# Altium PCB Expansor_conn.PcbDoc
Units mm, origin at the board's own origin, x right, y up, seen from the top; angles counter-clockwise.
Board outline 149.86 x 116.48 mm, 2 copper layers (Top Layer, Bottom Layer); 7 components, 31 nets, 70 pads, 5 vias.
Unrouted connection lines stored in the file: 5.
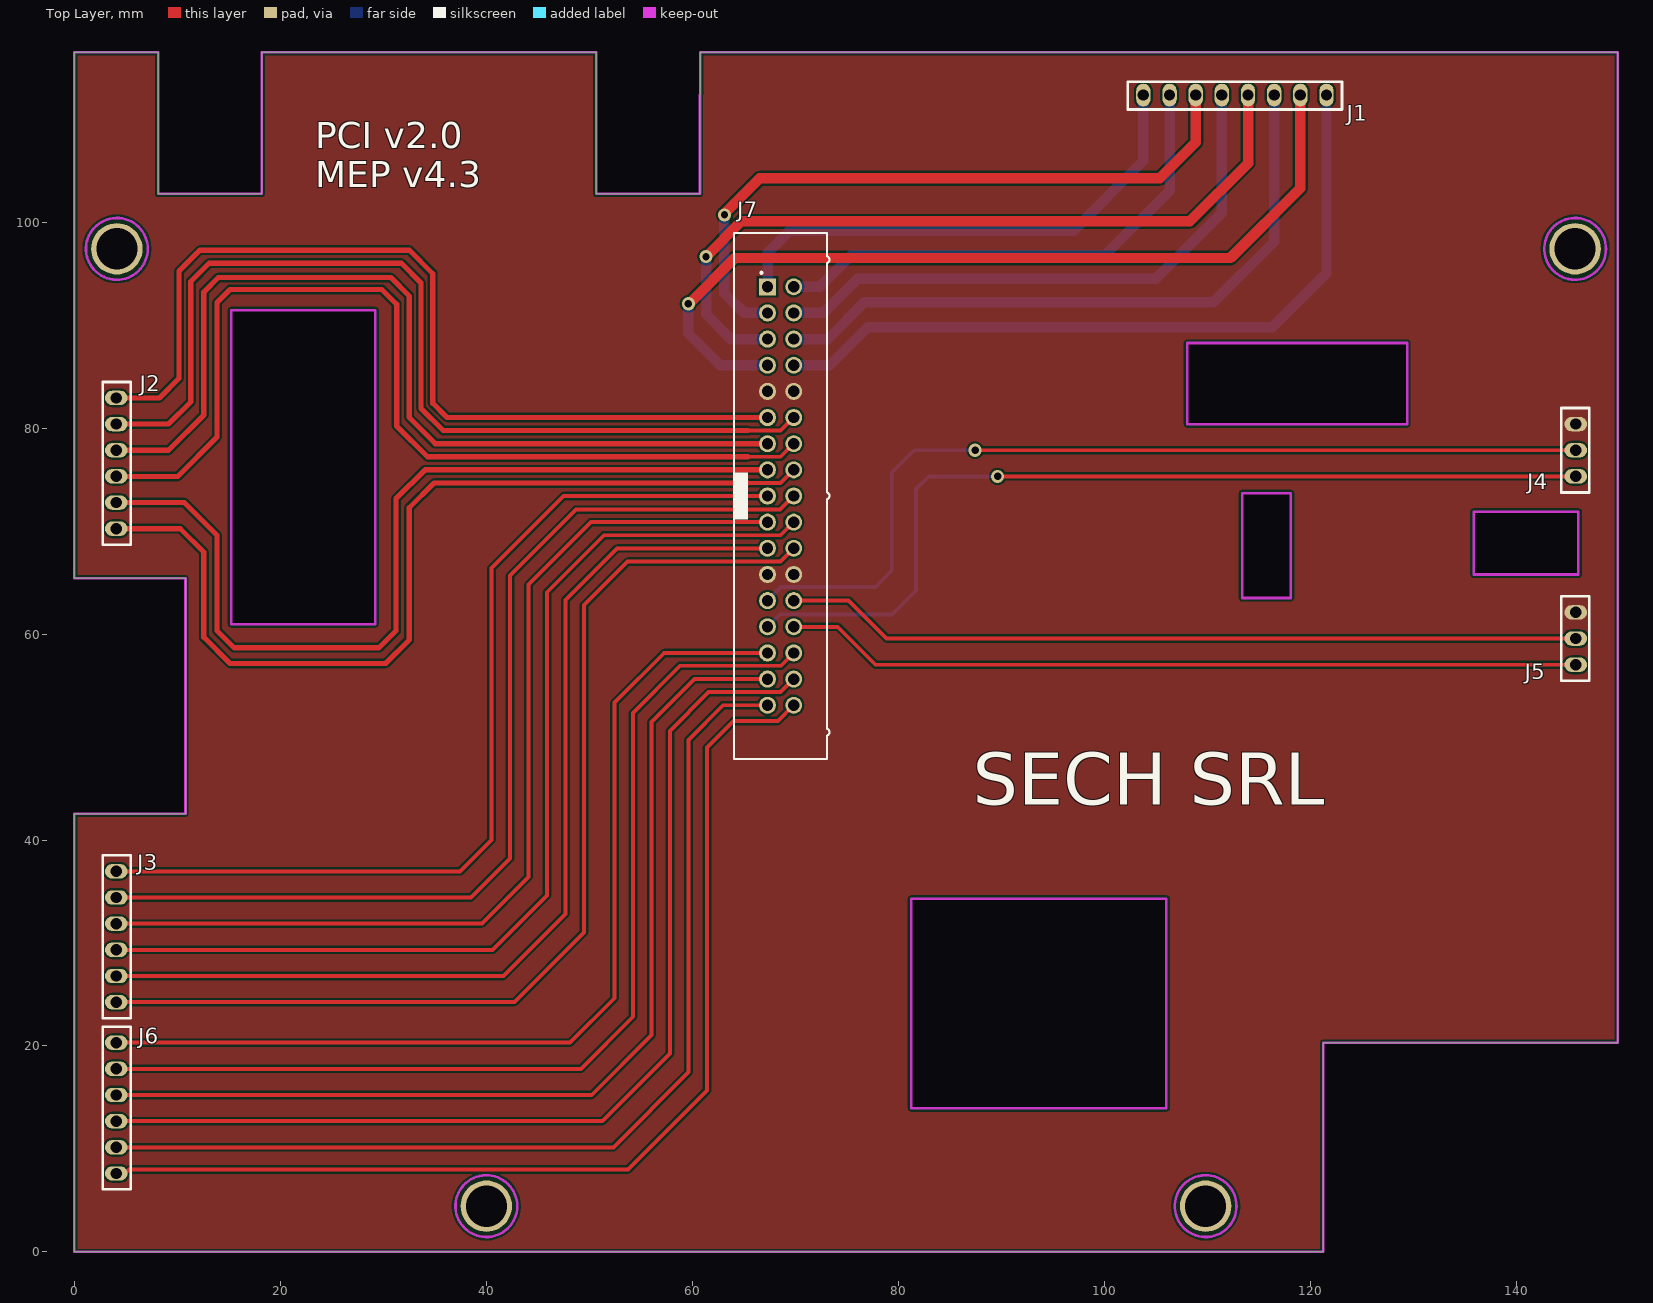
[diagram p0: Top Layer view]
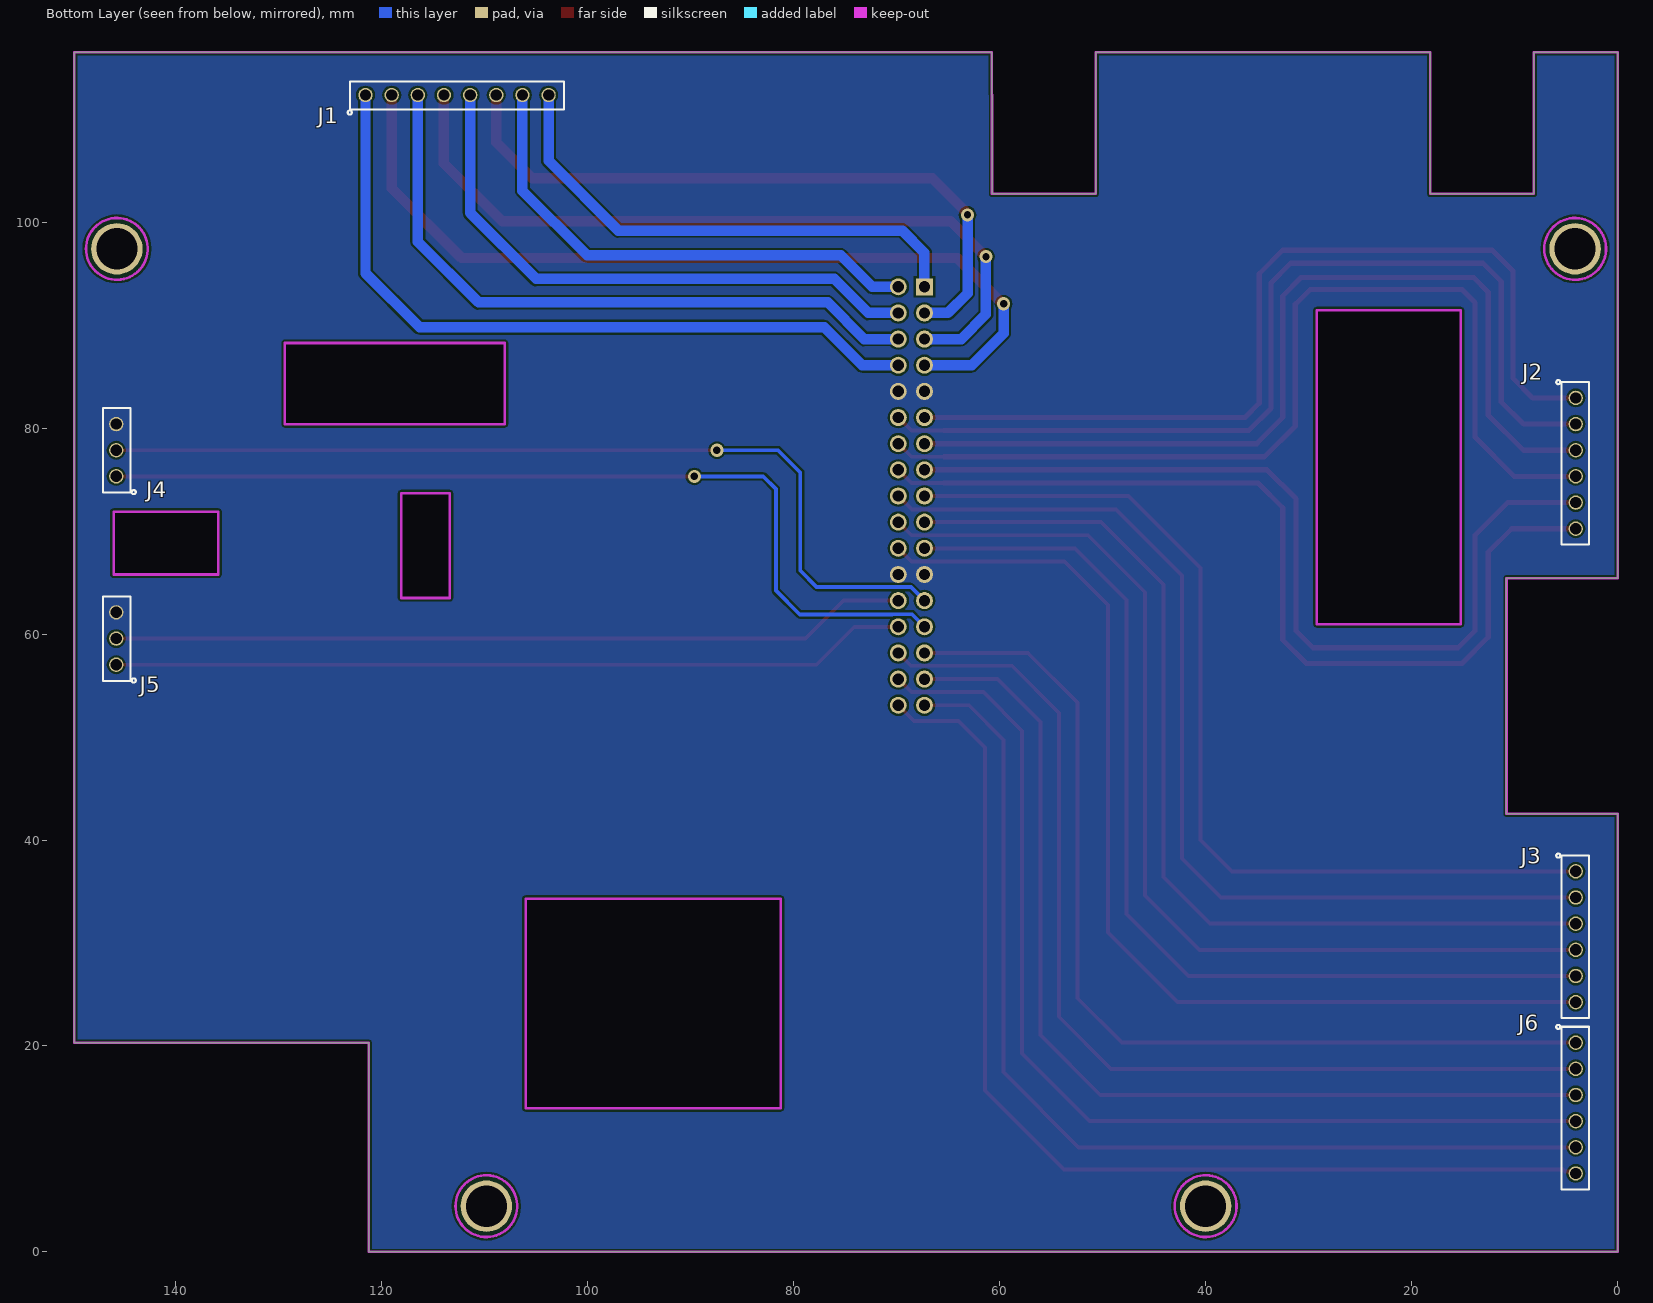
[diagram p1: Bottom Layer view, seen from below]

## Layer stack, top to bottom
Top Solder: solder mask 0.0102, Solder Resist, Dk 3.5
Top Layer: signal copper 0.0356
Dielectric 1: dielectric 0.32, FR-4, Dk 4.8
Bottom Layer: signal copper 0.0356
Bottom Solder: solder mask 0.0102, Solder Resist, Dk 3.5

## Board outline
0,0 0,42.545 10.795,42.545 10.795,65.405 0,65.405 0,116.484 8.128,116.484 8.128,102.742 18.193,102.742 18.193,112.394 18.195,112.394 18.195,116.484 50.684,116.484 50.684,102.742 60.749,102.742 60.749,112.394 60.759,112.39 60.759,116.484 149.86,116.484 149.86,20.32 121.285,20.32 121.285,0
cut-out: 135.89,65.786 146.05,65.786 146.05,71.882 135.89,71.882
cut-out: 108.077,80.391 129.413,80.391 129.413,88.265 108.077,88.265
cut-out: 113.411,63.5 118.11,63.5 118.11,73.66 113.411,73.66
cut-out: 29.21,60.96 29.21,91.44 15.24,91.44 15.24,60.96
cut-out: 106.045,13.97 106.045,34.29 81.28,34.29 81.28,13.97

## Design rules (kind name [scope] priority, off if disabled: settings)
Clearance [All] p1: gap=0.2 ignorepadtopadclearanceinfootprint=TRUE
ParallelSegment [All] p1: limit=1.016 gap=0.508
PlaneConnect [All] p1: planeconnectstyle=Direct reliefexpansion=0.508 reliefentries=4 reliefconductorwidth=0.254 reliefairgap=0.254
PolygonConnect [All] p1: connectstyle=Direct reliefconductorwidth=0.254 reliefentries=4 polygonreliefangle="90 Angle" airgapwidth=0.254
RoutingVias [All] p1: holewidth=0.508 width=1.016 viastyle="Through Hole" minholewidth=0.254 minwidth=0.508 maxholewidth=1.778 maxwidth=1.27
SolderMaskExpansion [All] p1: expansion=0.102 istentingtop=FALSE
Width Width_RS485 [InNetClass('RS485')] p1: maxlimit=0.508 minlimit=0.381 preferedwidth=0.381
Width Width_DigitalIn [InNetClass('DigitalIn')] p2: maxlimit=0.508 minlimit=0.381 preferedwidth=0.381
Width Width_DO24V [InNetClass('DO_24V')] p3: maxlimit=1.016 minlimit=0.508 preferedwidth=1.016
Width Width_AnalogIn [InNetClass('AnalogIn')] p4: maxlimit=0.508 minlimit=0.381 preferedwidth=0.508
Width [All] p5: maxlimit=1.016 minlimit=0.381 preferedwidth=0.508 minimp=50.000000 maximp=50.000000 favimp=50.000000
29 further rules are at their usual default settings.

## Components (designator, comment, footprint, x,y, rotation, side; value= is the part's Value field where it differs from the comment)
J1 "HDRF8" HDR_F_1X8 121.59,112.344 r180 bottom
J2 "HDRF6" HDR_F_1X6 4.064,82.931 r270 bottom
J3 "HDRF6" HDR_F_1X6 4.064,36.957 r270 bottom
J4 "HDRF3" HDR_F_1X3 145.796,75.311 r90 bottom
J5 "HDRF3" HDR_F_1X3 145.796,57.023 r90 bottom
J6 "HDRF6" HDR_F_1X6 4.064,20.32 r270 bottom
J7 "6120XX21621_61203421621" 61203421621 68.58,73.406 r270 top

## Footprints (in the part's own frame and the unit in brackets; to place one, negate y for a bottom-side part, rotate by r counter-clockwise, add the part's x,y. Pads: shape width x height; smd on the part's side, far side on the other; paste and mask are expansions set on the pad)
61203421621 [mm]
  rect 1.65x1.65 hole 1.1: 1(-20.32,-1.27)
  round 1.65 hole 1.1: 2(-20.32,1.27) 3(-17.78,-1.27) 4(-17.78,1.27) 5(-15.24,-1.27) 6(-15.24,1.27) 7(-12.7,-1.27) 8(-12.7,1.27) 9(-10.16,-1.27) 10(-10.16,1.27) 11(-7.62,-1.27) 12(-7.62,1.27) 13(-5.08,-1.27) 14(-5.08,1.27) 15(-2.54,-1.27) 16(-2.54,1.27) 17(0,-1.27) 18(0,1.27) 19(2.54,-1.27) 20(2.54,1.27) 21(5.08,-1.27) 22(5.08,1.27) 23(7.62,-1.27) 24(7.62,1.27) 25(10.16,-1.27) 26(10.16,1.27) 27(12.7,-1.27) 28(12.7,1.27) 29(15.24,-1.27) 30(15.24,1.27) 31(17.78,-1.27) 32(17.78,1.27) 33(20.32,-1.27) 34(20.32,1.27)
  silkscreen extent -25.52,-4.53 25.52,4.74, body extent -25.42,-4.45 25.42,4.73, height 9
HDR_F_1X3 [mm] "HEADER FEMALE pitch: 2.54mm"
  round 1.4 / inner round 1.4 / far side oval 1.4x2.2 hole 1.1 mask+0.1: 1(0,0) 2(2.54,0) 3(5.08,0)
  silkscreen extent -1.73,-1.9 6.64,1.3, body extent -1.39,-1.3 6.48,1.2, height 8.5
HDR_F_1X6 [mm] "HEADER FEMALE pitch: 2.54mm"
  round 1.4 / inner round 1.4 / far side oval 1.4x2.2 hole 1.1 mask+0.1: 1(0,0) 2(2.54,0) 3(5.08,0) 4(7.62,0) 5(10.16,0) 6(12.7,0)
  silkscreen extent -1.73,-1.9 14.25,1.3, body extent -1.39,-1.3 14.1,1.2, height 8.5
HDR_F_1X8 [mm] "HEADER FEMALE pitch: 2.54mm"
  round 1.4 / inner round 1.4 / far side oval 1.4x2.2 hole 1.1 mask+0.1: 1(0,0) 2(2.54,0) 3(5.08,0) 4(7.62,0) 5(10.16,0) 6(12.7,0) 7(15.24,0) 8(17.78,0)
  silkscreen extent -1.73,-1.9 19.29,1.3, body extent -1.39,-1.3 19.18,1.2, height 8.5

## Part data
J1: library part "Header Female 1x8 THT", "CONN, HEADER, Female, pitch: 2.54mm, 8POS", =http://www.chila.ir
J2 J3 J6: library part "Header Female 1x6 THT", "CONN, HEADER, Female, pitch: 2.54mm, 6POS", =http://www.chila.ir
J4 J5: library part "Header Female 1x3 THT", "CONN, HEADER, Female, pitch: 2.54mm, 3POS", =http://www.chila.ir
J7: "34 pins, straight, gold plating", Package=None, Check_prices=https://www.snapeda.com/parts/61203421621/Wurth+Electronics/view-part/?ref=eda, MF="Wurth Electronics", MP=61203421621, SnapEDA_Link=https://www.snapeda.com/parts/61203421621/Wurth+Electronics/view-part/?ref=snap

## Free pads (board coordinates)
  round 5 hole 4: 2(4.128,97.409) 2(40.005,4.445) 2(109.855,4.445) 2(145.732,97.409)

## Via types
v1: diameter 1.27, hole 0.711, Top Layer to Bottom Layer, 5 vias

## Nets (pads, with @x,y where several pads share a name; then routed paths per layer and width w, separated by ;. In a path a pad name is that pad's centre, name@x,y a point inside that pad or via, vN(x,y) a via of type N, cw(c..) or ccw(c..) an arc to the next point about the centre after c; other vN are vias at no path point)
24V-A: J1.8 J7.1 | length 49.9
  Bottom Layer w1.016: J7.1 67.31,97.028 69.469,99.187 97.028,99.187 103.81,105.969 J1.8
24V-B: J1.7 J7.2 | length 49.7
  Bottom Layer w1.016: J7.2 72.39,93.726 75.438,96.774 100.076,96.774 106.35,103.048 J1.7
24V-UI: J1.6 J7.3 | length 66
  Top Layer w1.016: v1@63.002,100.721 66.548,104.267 105.41,104.267 108.89,107.747 J1.6
  Bottom Layer w1.016: v1@63.119,100.711 63.119,93.091 65.024,91.186 J7.3
  other v1: 63.135,100.709
A: J4.2 J7.25 | length 90.1
  Top Layer w0.381: v1(87.467,77.851) J4.2
  Bottom Layer w0.381: J7.25 68.635,64.571 77.779,64.571 79.375,66.167 79.375,75.692 81.534,77.851 v1(87.467,77.851)
AI1: J2.6 J7.16 | length 91.3
  Top Layer w0.381: 65.405,74.676 68.58,74.676 J7.16
  Top Layer w0.508: J2.6 10.287,70.231 12.573,67.945 12.573,59.69 15.113,57.15 30.226,57.15 32.512,59.436 32.512,72.263 34.925,74.676 65.405,74.676
AI2: J2.5 J7.15 | length 89.2
  Top Layer w0.508: J2.5 10.668,72.771 13.843,69.596 13.843,60.325 15.494,58.674 29.591,58.674 31.242,60.325 31.242,73.152 34.036,75.946 J7.15
AUX: J2.4 J7.14 | length 95.1
  Top Layer w0.381: 65.405,77.216 68.58,77.216 J7.14
  Top Layer w0.508: J2.4 10.033,75.311 13.843,79.121 13.843,92.202 15.113,93.472 29.845,93.472 31.296,92.021 31.296,80.21 34.29,77.216 65.405,77.216
B: J4.1 J7.27 | length 90.3
  Top Layer w0.381: v1(89.662,75.311) J4.1
  Bottom Layer w0.381: J7.27 68.525,61.921 70.413,61.921 70.44,61.894 79.42,61.894 81.743,64.217 81.743,74.086 82.967,75.311 v1(89.662,75.311)
BAT: J2.3 J7.13 | length 90.8
  Top Layer w0.508: J2.3 9.144,77.851 12.573,81.28 12.573,93.218 13.97,94.615 30.734,94.615 32.512,92.837 32.512,81.026 35.052,78.486 J7.13
DI1: J6.6 J7.34 | length 104.1
  Top Layer w0.381: J6.6 4.259,7.815 5.138,7.815 5.324,8.001 53.775,8.001 61.431,15.658 61.431,48.985 64.008,51.562 68.326,51.562 J7.34
DI2: J6.5 J7.33 | length 99.9
  Top Layer w0.381: J6.5 52.341,10.16 59.635,17.454 59.635,49.729 62.992,53.086 J7.33
DI3: J6.4 J7.32 | length 101.9
  Top Layer w0.381: J6.4 51.289,12.7 57.839,19.25 57.839,50.6 61.595,54.356 68.58,54.356 J7.32
DI4: J6.3 J7.31 | length 97.8
  Top Layer w0.381: J6.3 50.237,15.24 56.043,21.046 56.043,51.471 60.198,55.626 J7.31
DI5: J6.2 J7.30 | length 99.8
  Top Layer w0.381: J6.2 49.185,17.78 54.247,22.842 54.247,52.342 58.826,56.921 68.605,56.921 J7.30
DI6: J6.1 J7.29 | length 95.7
  Top Layer w0.381: J6.1 48.133,20.32 52.451,24.638 52.451,53.34 57.277,58.166 J7.29
DO6: J1.3 J7.6 | length 64.8
  Bottom Layer w1.016: J7.6 73.152,88.646 76.708,92.202 110.617,92.202 116.51,98.095 J1.3
DO7: J1.2 J7.7 | length 84.9
  Top Layer w1.016: v1(59.627,92.075) 59.69,92.075 64.135,96.52 112.268,96.52 119.05,103.302 J1.2
  Bottom Layer w1.016: v1(59.627,92.075) 59.627,89.218 62.738,86.106 J7.7
DO8: J1.1 J7.8 | length 72.7
  Bottom Layer w1.016: J7.8 73.365,86.106 77.048,89.789 116.332,89.789 121.59,95.047 J1.1
EVC: J1.5 J7.4 | length 57.1
  Bottom Layer w1.016: J7.4 72.771,91.186 76.073,94.488 105.029,94.488 111.43,100.889 J1.5
GND: J4.3 J5.3 J7.9 J7.10 J7.23 J7.24
PSH: J3.6 J7.22 | length 102.7
  Top Layer w0.381: J3.6 42.726,24.257 49.493,31.025 49.493,62.828 53.721,67.056 68.58,67.056 J7.22
PSL: J3.1 J7.17 | length 93.8
  Top Layer w0.381: J3.1 37.465,36.957 40.513,40.005 40.513,66.421 47.498,73.406 J7.17
PTA: J2.1 J7.11 | length 89.4
  Top Layer w0.508: J2.1 8.255,82.931 10.16,84.836 10.16,95.25 12.192,97.282 32.512,97.282 34.798,94.996 34.798,82.423 36.195,81.026 J7.11
PTB: J2.2 J7.12 | length 93.5
  Top Layer w0.381: 65.405,79.756 68.58,79.756 J7.12
  Top Layer w0.508: J2.2 9.144,80.391 11.303,82.55 11.303,94.234 13.081,96.012 31.75,96.012 33.655,94.107 33.655,81.915 35.814,79.756 65.405,79.756
RS485-A: J5.1 J7.28 | length 77.5
  Top Layer w0.381: J7.28 74.132,60.706 77.815,57.023 J5.1
RS485-B: J5.2 J7.26 | length 77.5
  Top Layer w0.381: J7.26 75.184,63.246 78.867,59.563 J5.2
SMM: J3.5 J7.21 | length 98.3
  Top Layer w0.381: J3.5 41.673,26.797 47.697,32.821 47.697,63.318 52.705,68.326 J7.21
SMP: J3.4 J7.20 | length 100.2
  Top Layer w0.381: J3.4 40.621,29.337 45.901,34.617 45.901,64.062 51.435,69.596 68.58,69.596 J7.20
WKUP: J1.4 J7.5 | length 75.6
  Top Layer w1.016: v1(61.341,96.647) 64.77,100.076 108.331,100.076 113.97,105.715 J1.4
  Bottom Layer w1.016: v1(61.341,96.647) 61.341,91.059 63.754,88.646 J7.5
ZSA: J3.3 J7.19 | length 96
  Top Layer w0.381: J3.3 39.569,31.877 44.105,36.413 44.105,64.806 50.165,70.866 J7.19
ZSC: J3.2 J7.18 | length 98
  Top Layer w0.381: J3.2 38.517,34.417 42.309,38.209 42.309,65.677 48.713,72.081 68.525,72.081 J7.18

## Polygon pours and split planes (outlines as drawn)
GND on Bottom Layer "NONET_L-01_P-001" (solid, remove dead copper, pour order 0): 0,42.545 10.795,42.545 10.795,65.405 0,65.405 0,116.484 8.128,116.484 8.128,102.742 18.193,102.742 18.193,112.394 18.195,112.394 18.195,116.484 50.684,116.484 50.684,102.742 60.749,102.742 60.749,112.394 60.759,112.39 60.759,116.484 149.86,116.484 149.86,20.32 121.285,20.32 121.285,0 0,0
GND on Top Layer "NONET_L-01_P-001" (solid, remove dead copper, pour order 1): 0,42.545 10.795,42.545 10.795,65.405 0,65.405 0,116.484 8.128,116.484 8.128,102.742 18.193,102.742 18.193,112.394 18.195,112.394 18.195,116.484 50.684,116.484 50.684,102.742 60.749,102.742 60.749,112.394 60.759,112.39 60.759,116.484 149.86,116.484 149.86,20.32 121.285,20.32 121.285,0 0,0

## Keep-outs
Top Layer:
  circle w0.254: c40.005,4.445 r3
  circle w0.254: c109.855,4.445 r3
  circle w0.254: c145.732,97.409 r3
  circle w0.254: c4.128,97.409 r3
Bottom Layer:
  circle w0.254: c4.128,97.409 r3
  circle w0.254: c145.732,97.409 r3
  circle w0.254: c109.855,4.445 r3
  circle w0.254: c40.005,4.445 r3
Keep-Out Layer:
  pour cut-out: 135.89,65.786 146.05,65.786 146.05,71.882 135.89,71.882
  lines w0.254: 18.195,116.484 50.684,116.484 ; 18.195,116.486 18.195,112.394 ; 50.692,112.39 50.684,112.39 50.684,116.484 ; 60.749,112.394 60.749,102.742 60.75,102.742 50.684,102.742 50.684,116.484 ; 60.759,112.39 60.759,116.484 149.86,116.484 149.86,20.32 121.285,20.32 121.285,0 0,0 0,42.545 10.795,42.545 10.795,65.405 0,65.405 0,116.484 8.128,116.484 8.128,102.742 18.195,102.742 ; 18.193,102.742 18.193,112.394 ; 18.193,102.742 18.195,102.742 ; 18.193,112.394 18.195,112.394 ; 15.24,60.96 15.24,91.44 29.21,91.44 29.21,60.96 15.24,60.96 ; 81.28,13.97 81.28,34.29 106.045,34.29 106.045,13.97 81.28,13.97 ; 108.077,80.391 108.077,88.265 129.413,88.265 129.413,80.391 108.077,80.391 ; 113.411,63.5 113.411,73.66 118.11,73.66 118.11,63.5 113.411,63.5 ; 135.89,65.786 135.89,71.882 146.05,71.882 146.05,65.786 135.89,65.786

## Silkscreen, mask and mechanical layers (free items; w line width, h text height)
Top Overlay:
  lines w0.254: 2.764,6.07 5.464,6.07 5.464,21.87 2.764,21.87 2.764,6.07 ; 2.764,22.707 5.464,22.707 5.464,38.507 2.764,38.507 2.764,22.707 ; 2.764,68.681 5.464,68.681 5.464,84.481 2.764,84.481 2.764,68.681 ; 102.3,110.944 123.1,110.944 123.1,113.644 102.3,113.644 102.3,110.944 ; 144.396,55.463 147.096,55.463 147.096,63.663 144.396,63.663 144.396,55.463 ; 144.396,73.751 147.096,73.751 147.096,81.951 144.396,81.951 144.396,73.751
  text "J1" at 123.571,109.855 h1.52
  text "PCI v2.0 / MEP v4.3" at 23.368,103.378 h2.54
  text "J2" at 6.35,83.566 h1.52
  text "J4" at 141.097,74.041 h1.52
  text "J5" at 140.843,55.626 h1.52
  text "SECH SRL" at 87.249,43.434 h5.08
  text "J3" at 6.096,37.084 h1.52
  text "J6" at 6.223,20.193 h1.52
Drill Drawing:
  pour cut-out: 133.604,70.612